# EAGLE board TM (EAGLE 7.5.0)
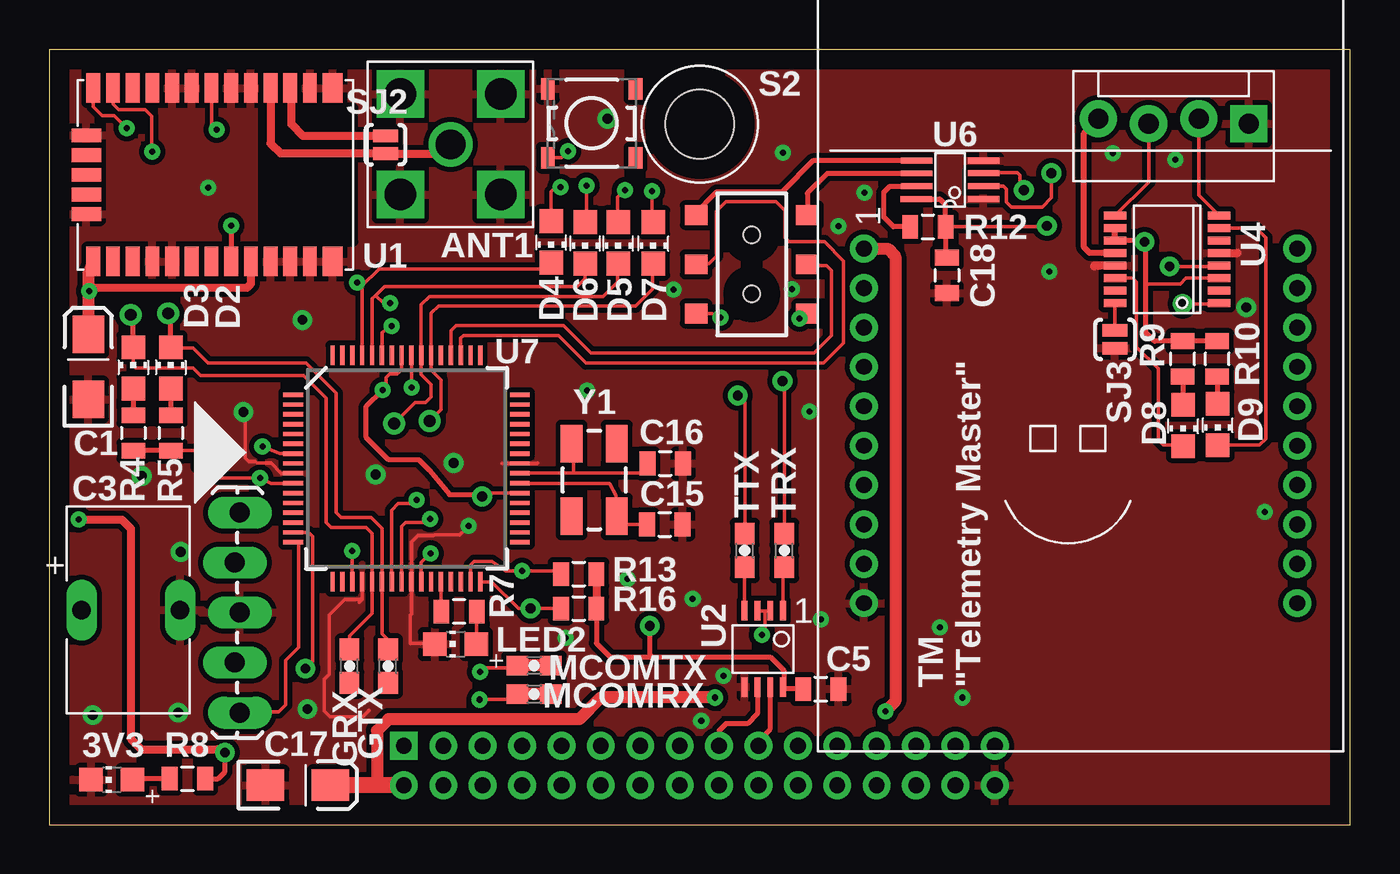
[diagram p0: board, top side]
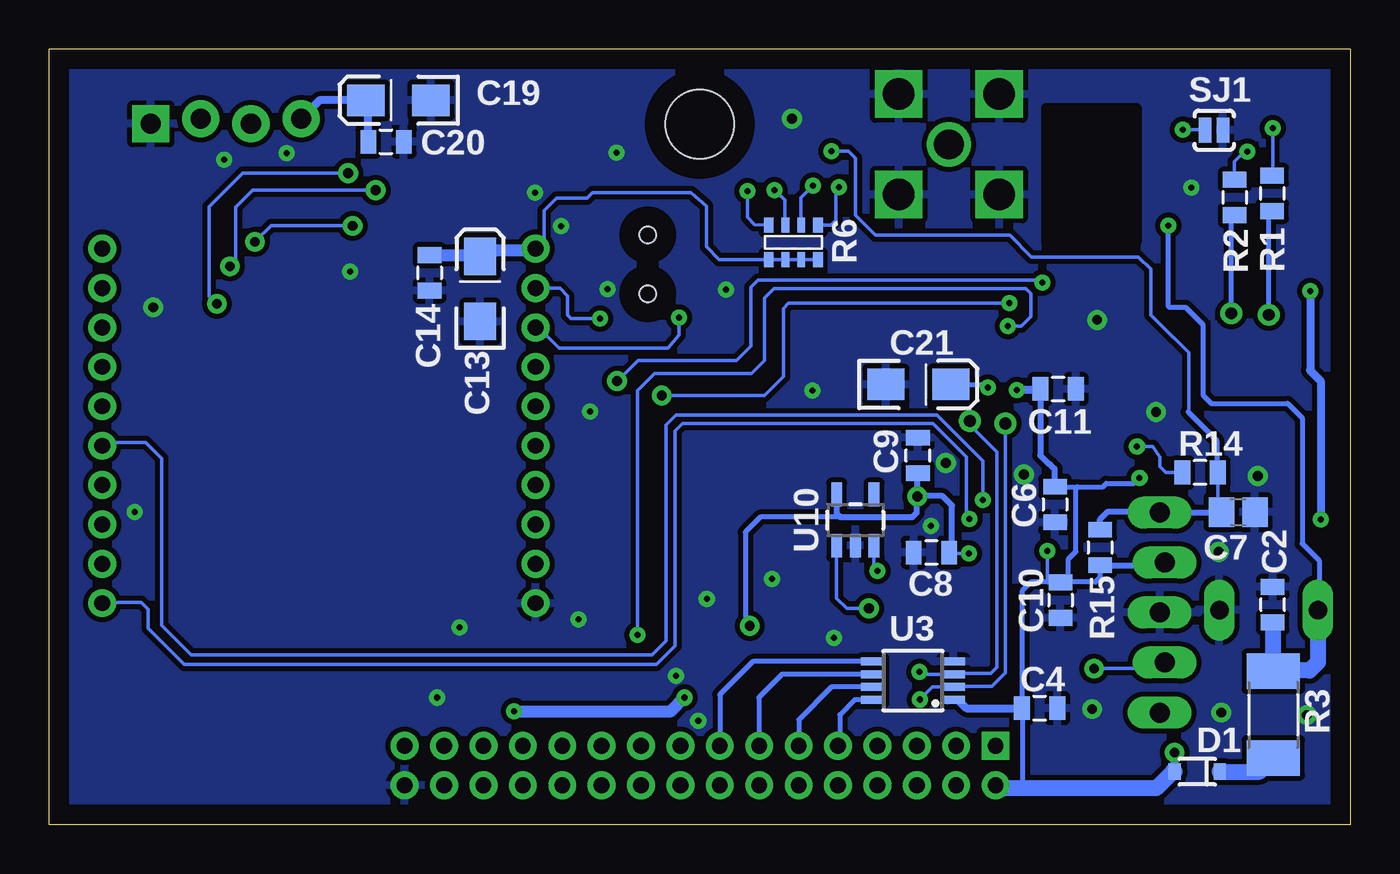
[diagram p1: board, bottom side, seen from below]

Size 66.04 x 39.37 mm. Coordinates in mm from the lower left corner, seen from the top.
Copper layers (1*16): Top 0.035mm / dielectric 1.5mm / Bottom 0.035mm
Design rules "SparkFun *": minimum track width 7mil, minimum drill 12mil, track to track 8mil, track to pad 8mil, pad to pad 8mil, via to via 8mil, smd to smd 8mil, copper to edge 40mil, drill to drill 8mil, minimum pad ring 12mil, minimum via ring 10mil, stop-mask expansion 4mil, vias tented up to drill 25mil, thermal gap 10mil

## Footprints (pad centres in the part's own frame; a part is rotated, then mirrored left to right if it is on the bottom)
CHIP-LED0805 = smd 1.2 x 1.2: A 0,-1.05; C 0,1.05
CONSMA002 = drill 1.6 square: 1 -2.55,2.55; 2 2.55,2.55; 3 2.55,-2.55; 4 -2.55,-2.55 | drill 1.5: C 0,0
EIA3216-16V = smd 1.9 x 1.6: A 1.65,0; C -1.65,0
0805 = smd 0.8 x 1.2: 1 -0.9,0; 2 0.9,0
EEC-S0HD224V = drill 0.95 long: + 0,2.5; - 0,-2.5
C0805 = smd 1.3 x 1.5: 1 -0.85,0; 2 0.85,0
CARD-2016 = drill 0.8 square: 1 18,4 | drill 0.8: 2 18,2; 3 20,4; 4 20,2; 5 22,4; 6 22,2; 7 24,4; 8 24,2; 9 26,4; 10 26,2; 11 28,4; 12 28,2; 13 30,4; 14 30,2; 15 32,4; 16 32,2; 17 34,4; 18 34,2; 19 36,4; 20 36,2; 21 38,4; 22 38,2; 23 40,4; 24 40,2; 25 42,4; 26 42,2; 27 44,4; 28 44,2; 29 46,4; 30 46,2; 31 48,4; 32 48,2 | hole 3.5: 33.02,35.56
SOD-323 = smd 0.63 x 0.83: 1 -1.15,0; 2 1.15,0
CHIP_LED0805 = smd 1.2 x 1.2: A 0,-1.05; C 0,1.05
0603 = smd 1.1 x 1: 1 -0.85,0; 2 0.85,0
1X05_LOCK_LONGPADS = drill 1.016 long: 1 0,0; 2 2.54,-0.254; 3 5.08,0; 4 7.62,-0.254; 5 10.16,0
MOLEX-1X4_LOCK = drill 1.016 pad 1.88 square: 1 0,0.127 | drill 1.016 pad 1.88: 2 2.54,-0.127; 3 5.08,0.127; 4 7.62,-0.127
R2010 = smd 1.8 x 2.7: 1 -2.2,0; 2 2.2,0
MNR14 = smd 0.5 x 0.75: 1 -1.25,-0.9; 4 1.25,-0.9; 5 1.25,0.85; 8 -1.25,0.85 | smd 0.4 x 0.75: 2 -0.4,-0.9; 3 0.4,-0.9; 6 0.4,0.85; 7 -0.4,0.85
AYZ0202 = smd 1 x 1.15: 1 -2.5,2.825; 2 0,2.825; 3 2.5,2.825; 4 -2.5,-2.825; 5 0,-2.825; 6 2.5,-2.825 | hole 0.85: 1.5,0; -1.5,0
TACTILE_SWITCH_SMD-2 = smd 0.7 x 1.1: 1 2.225,1.75; 2 2.225,-1.75; 3 -2.225,-1.75; 4 -2.225,1.75
SJ_2S-NO = smd 0.635 x 1.27: 1 -0.45,0; 2 0.45,0
PAD-JUMPER-2-NO_YES_SILK = smd 0.635 x 1.27: 1 -0.45,0; 2 0.45,0
CAM-M8Q = smd 1.5 x 0.7: 1 4.4,0; 2 4.4,1; 3 4.4,2; 4 4.4,3; 5 4.4,4; 6 4.4,5; 7 4.4,6; 8 4.4,7; 9 4.4,8; 10 4.4,9; 11 4.4,10; 12 4.4,11; 15 -4.4,11; 16 -4.4,10; 17 -4.4,9; 18 -4.4,8; 19 -4.4,7; 20 -4.4,6; 21 -4.4,5; 22 -4.4,4; 23 -4.4,3; 24 -4.4,2; 25 -4.4,1; 26 -4.4,0 | smd 1.5 x 1: 13 4.4,12.15; 14 -4.4,12.15 | smd 0.7 x 1.5: 27 -2,-0.35; 28 -1,-0.35; 29 0,-0.35; 30 1,-0.35; 31 2,-0.35
MSOP-8 = smd 0.3 x 1: 1 -0.975,-1.95; 2 -0.325,-1.95; 3 0.325,-1.95; 4 0.975,-1.95; 5 0.975,1.925; 6 0.325,1.925; 7 -0.325,1.925; 8 -0.975,1.925
MSOP8 = smd 0.4 x 1.2: 1 -0.975,-2.05; 2 -0.325,-2.05; 3 0.325,-2.05; 4 0.975,-2.05; 5 0.975,2.05; 6 0.325,2.05; 7 -0.325,2.05; 8 -0.975,2.05
SSOP-16 = smd 0.419 x 1.143: 1 -2.223,-2.642; 2 -1.587,-2.642; 3 -0.953,-2.642; 4 -0.318,-2.642; 5 0.318,-2.642; 6 0.953,-2.642; 7 1.587,-2.642; 8 2.223,-2.642; 9 2.223,2.642; 10 1.587,2.642; 11 0.953,2.642; 12 0.318,2.642; 13 -0.318,2.642; 14 -0.953,2.642; 15 -1.587,2.642; 16 -2.223,2.642
RM024-TH = drill 0.8: 1 9,11; 2 7,11; 3 5,11; 4 3,11; 5 1,11; 6 -1,11; 7 -3,11; 8 -5,11; 9 -7,11; 10 -9,11; 11 -9,-11; 12 -7,-11; 13 -5,-11; 14 -3,-11; 15 -1,-11; 16 1,-11; 17 3,-11; 18 5,-11; 19 7,-11; 20 9,-11
VFSOP-8 = smd 0.3 x 1.6: 1 -0.98,-1.7; 2 -0.33,-1.7; 3 0.33,-1.7; 4 0.98,-1.7; 5 0.97,1.69; 6 0.325,1.7; 7 -0.33,1.7; 8 -0.98,1.71
TQFP-64 = smd 0.22 x 1: 1 -3.75,-5.75; 2 -3.25,-5.75; 3 -2.75,-5.75; 4 -2.25,-5.75; 5 -1.75,-5.75; 6 -1.25,-5.75; 7 -0.75,-5.75; 8 -0.25,-5.75; 9 0.25,-5.75; 10 0.75,-5.75; 11 1.25,-5.75; 12 1.75,-5.75; 13 2.25,-5.75; 14 2.75,-5.75; 15 3.25,-5.75; 16 3.75,-5.75; 33 3.75,5.75; 34 3.25,5.75; 35 2.75,5.75; 36 2.25,5.75; 37 1.75,5.75; 38 1.25,5.75; 39 0.75,5.75; 40 0.25,5.75; 41 -0.25,5.75; 42 -0.75,5.75; 43 -1.25,5.75; 44 -1.75,5.75; 45 -2.25,5.75; 46 -2.75,5.75; 47 -3.25,5.75; 48 -3.75,5.75 | smd 1 x 0.22: 17 5.75,-3.75; 18 5.75,-3.25; 19 5.75,-2.75; 20 5.75,-2.25; 21 5.75,-1.75; 22 5.75,-1.25; 23 5.75,-0.75; 24 5.75,-0.25; 25 5.75,0.25; 26 5.75,0.75; 27 5.75,1.25; 28 5.75,1.75; 29 5.75,2.25; 30 5.75,2.75; 31 5.75,3.25; 32 5.75,3.75; 49 -5.75,3.75; 50 -5.75,3.25; 51 -5.75,2.75; 52 -5.75,2.25; 53 -5.75,1.75; 54 -5.75,1.25; 55 -5.75,0.75; 56 -5.75,0.25; 57 -5.75,-0.25; 58 -5.75,-0.75; 59 -5.75,-1.25; 60 -5.75,-1.75; 61 -5.75,-2.25; 62 -5.75,-2.75; 63 -5.75,-3.25; 64 -5.75,-3.75
SOT23-5 = smd 0.55 x 1.2: 1 -0.95,-1.3; 2 0,-1.3; 3 0.95,-1.3; 4 0.95,1.3; 5 -0.95,1.3
CRYSTAL-SMD-5X3 = smd 1.9 x 1.1: 1 -1.85,-1.15; 2 1.85,-1.15; 3 1.85,1.15; 4 -1.85,1.15

## Placement (x,y rotation side)
3V3  [CHIP-LED0805]  3.17,2.29 90 top
ANT1  CONMCX002  [CONSMA002]  20.37,34.54 270 top
C1  10UF  [EIA3216-16V]  1.98,23.24 90 top
C2  1UF  [0805]  3.94,11.18 90 bottom
C3  220MF  [EEC-S0HD224V]  4.14,10.9 90 top
C4  0.1UF  [0805]  15.77,5.92 0 bottom
C5  0.1UF  [0805]  39.17,6.88 0 top
C6  0.1UF  [0805]  14.99,16.26 270 bottom
C7  10n  [C0805]  5.69,15.88 0 bottom
C8  0.1UF  [0805]  21.26,13.82 180 bottom
C9  0.1UF  [0805]  21.95,18.75 90 bottom
C10  0.1UF  [0805]  14.71,11.4 270 bottom
C11  0.1UF  [0805]  14.83,22.12 0 bottom
C13  10UF  [EIA3216-16V]  44.17,27.2 90 bottom
C14  1UF  [0805]  46.74,28.02 270 bottom
C15  12PF  [0805]  31.24,15.24 0 top
C16  12PF  [0805]  31.27,18.34 0 top
C17  10UF  [EIA3216-16V]  12.62,2.01 0 top
C18  0.1UF  [0805]  45.57,27.89 270 top
C19  10UF  [EIA3216-16V]  48.31,36.78 180 bottom
C20  0.1UF  [0805]  48.95,34.67 0 bottom
C21  10UF  [EIA3216-16V]  21.92,22.35 0 bottom
CARD1  CARD-2016CARD  [CARD-2016]  0,0 0 top
D1  BAS316-TP  [SOD-323]  7.77,2.69 180 bottom
D2  GREEN  [CHIP_LED0805]  6.17,23.19 0 top
D3  RED  [CHIP_LED0805]  4.27,23.19 0 top
D4  RED  [CHIP_LED0805]  25.48,29.59 180 top
D5  RED  [CHIP_LED0805]  28.88,29.54 180 top
D6  GREEN  [CHIP_LED0805]  27.2,29.54 180 top
D7  GREEN  [CHIP_LED0805]  30.66,29.54 180 top
D8  RED  [CHIP_LED0805]  57.56,20.27 180 top
D9  GREEN  [CHIP_LED0805]  59.31,20.32 180 top
GRX  TP  [0603]  15.24,8.05 90 top
GTX  TP  [0603]  17.2,8.05 90 top
ICSP  ICSP  [1X05_LOCK_LONGPADS]  9.68,15.85 270 top
JP13  [MOLEX-1X4_LOCK]  60.88,35.71 180 top
LED2  [CHIP-LED0805]  20.62,9.17 90 top
MCOMRX  TP  [0603]  24.61,6.63 180 top
MCOMTX  TP  [0603]  24.61,8.08 180 top
R1  220  [0805]  3.96,32.05 270 bottom
R2  220  [0805]  5.87,31.85 270 bottom
R3  50  [R2010]  3.91,5.59 270 bottom
R4  1K  [0805]  4.27,19.89 270 top
R5  1K  [0805]  6.17,19.89 270 top
R6  RN-4_1K  [MNR14]  28.27,29.54 180 bottom
R7  499  [0805]  20.8,10.82 180 top
R8  499  [0805]  7.01,2.34 0 top
R9  1K  [0805]  57.53,23.65 90 top
R10  1K  [0805]  59.28,23.65 90 top
R12  1K  [0805]  44.6,30.35 0 top
R13  2K  [0805]  26.87,12.73 0 top
R14  499  [0805]  7.62,17.88 180 bottom
R15  1K  [0805]  12.7,14.07 270 bottom
R16  2K  [0805]  26.87,10.97 0 top
S1  DPDT  [AYZ0202]  35.66,28.45 270 top
S2  ts  [TACTILE_SWITCH_SMD-2]  27.53,35.61 180 top
SJ1  NO  [SJ_2S-NO]  6.91,35.26 180 bottom
SJ2  NO  [SJ_2S-NO]  17.07,34.52 270 top
SJ3  [PAD-JUMPER-2-NO_YES_SILK]  54.1,24.64 90 top
TRX  TP  [0603]  37.31,13.92 90 top
TTX  TP  [0603]  35.31,13.92 90 top
U1  CAM-M8Q  [CAM-M8Q]  2.24,32.99 270 top
U2  SN75HVD08DRMSOP  [MSOP-8]  36.27,8.92 180 top
U3  ISL83077MSOP  [MSOP8]  22.2,7.32 90 bottom
U4  FT230X  [SSOP-16]  56.74,28.7 90 top
U5  RM024  [RM024-TH]  52.35,20.24 90 top
U6  SN74LVC2G241  [VFSOP-8]  45.72,32.74 90 top
U7  DSPIC33EP256GM306  [TQFP-64]  18.14,18.08 270 top
U10  24LC00T-I/OT  [SOT23-5]  25.12,15.47 0 bottom
U$3  INDPK1  [PICKIT-PIN-1]  9.96,18.9 90 top
Y1  12Mhz  [CRYSTAL-SMD-5X3]  27.66,17.5 90 top

## Library data of the parts
3V3 C7 LED2 = adafruit
ANT1 U1 U5 U7 U$3 = FSAE Eletric
C1 C13 C17 C19 C21 = FSAE Electric; PARTNO: T491A106M016AT
C2 C14 = FSAE Electric; PARTNO: UMK212F105ZG-T
C3 = FSAE Electric; PARTNO: EEC-S0HD224V
C4-C6 C8-C11 C18 C20 = FSAE Electric; PARTNO: CC0805ZRY5V9BB104
C15 C16 = FSAE Electric; PARTNO: CL21C120JBANNNC
CARD1 = FSAE Electric
D1 = SparkFun-DiscreteSemi
D2 D6 D7 D9 = FSAE Electric; PARTNO: LTST-S220GKT
D3-D5 D8 = FSAE Electric; PARTNO: LH R974-LP-1
GRX GTX MCOMRX MCOMTX TRX TTX = FSAE Electric; PARTNO: 1625854-3
ICSP JP13 = SparkFun-Connectors
R1 R2 = FSAE Electric; PARTNO: RC0805FR-07220RL
R3 SJ1-SJ3 = SparkFun-Passives
R4 R5 R9 R10 R12 R15 = FSAE Electric; PARTNO: RC0805FR-071KL
R6 = FSAE Electric; PARTNO: MNR14ERAPJ102
R7 R8 R14 = FSAE Electric; PARTNO: RC0805FR-07499RL
R13 R16 = FSAE Electric; PARTNO: RC0805FR-072KL
S1 = SparkFun-Electromechanical; PROD_ID: SWCH-08179
S2 = SparkFun-Electromechanical
U2 = FSAE Electric; PARTNO: ISL83072EIUZA-T
U3 = NASA_LIB; PARTNO: ISL83072EIUZA-T
U4 = FSAE Electric; PARTNO: FT230XS-R
U6 = FSAE Electric; PARTNO: SN74LVC2G241DCUR
U10 = FSAE Electric; PARTNO: 24LC00T-I/OT
Y1 = SparkFun-FreqCtrl

## Nets
3V: C18.1 R9.2 R10.2 R12.2 U4.3 U4.10 U4.11 U6.8
+3V3: C1.A C4.1 C5.1 C6.1 C8.1 C9.1 C10.1 C11.1 C13.A C14.1 C17.A CARD1.2 D1.2 ICSP.2 R4.2 R5.2 R6.5 R6.6 R6.7 R6.8 R8.2 R13.2 R15.2 R16.2 U1.1 U1.9 U2.8 U3.1 U5.1 U7.10 U7.19 U7.26 U7.38 U7.57 U10.5
CONNECTED: U5.15 U7.23
GND: 3V3.C ANT1.1 ANT1.2 ANT1.3 ANT1.4 C1.C C2.2 C3.- C4.2 C5.2 C6.2 C7.2 C8.2 C9.2 C10.2 C11.2 C13.C C14.2 C15.2 C16.2 C17.C C18.2 C19.C C20.2 C21.C CARD1.32 ICSP.3 JP13.1 LED2.C S2.2 SJ1.1 SJ3.1 U1.4 U1.5 U1.10 U1.11 U1.12 U1.13 U1.14 U1.15 U1.18 U1.19 U1.21 U1.22 U1.27 U1.31 U2.5 U3.4 U4.5 U4.13 U5.10 U6.1 U6.4 U7.9 U7.20 U7.25 U7.41 U10.2
GPS-RX: D3.C GRX.1 GRX.2 R1.2 U7.21
GPS-TX: D2.C GTX.1 GTX.2 R2.2 U7.22
HORNEN: U7.49
INRG: U7.50
N$1: D2.A R5.1
N$2: R2.1 U1.25
N$3: ANT1.C SJ2.2 U1.17
N$4: R1.1 U1.26
N$5: SJ1.2 U1.20
N$6: D1.1 R3.2
N$7: 3V3.A R8.1
N$8: C2.1 C3.+ R3.1 U1.8
N$9: D7.A R6.4
N$10: D5.A R6.3
N$12: R7.2 U7.28
N$13: C16.1 U7.40 Y1.3
N$14: C15.1 U7.39 Y1.1
N$15: LED2.A R7.1
N$16: R13.1 U7.31 U10.3
N$17: SJ2.1 U1.16
N$18: D9.A R10.1
N$19: D9.C U4.7
N$20: D8.C U4.14
N$21: U4.4 U6.3
N$22: D4.A R6.1
N$23: D6.A R6.2
N$24: D3.A R4.1
N$25: SJ3.2 U4.16
N$27: U4.1 U6.2
N$28: JP13.3 U4.9
N$29: D8.A R9.1
N$32: R16.1 U7.32 U10.1
N$61: JP13.2 U4.8
N$69: R12.1 U6.7
N$85: C19.A C20.1 JP13.4 U4.12
N$86: C7.1 ICSP.1 R14.1 R15.1 S2.1
N$87: R14.2 U7.7
N$88: C21.A U7.56
N$90: ICSP.4 U7.15
N$91: ICSP.5 U7.16
RS-ECU-A: CARD1.9 U3.8
RS-ECU-B: CARD1.11 U3.7
RS-ECU-Y: CARD1.15 U3.5
RS-ECU-Z: CARD1.13 U3.6
RX: S1.2 U7.52
RXD0: D4.C TRX.1 TRX.2 U2.1 U7.61
RXD2: D5.C MCOMRX.1 MCOMRX.2 U3.2 U7.55
RXD3: S1.1 U6.6
RXD4: S1.3 U5.2
SETUP: U5.11 U7.24
TSA: CARD1.17 U2.6
TSB: CARD1.19 U2.7
TX: S1.5 U7.51
TXD0: D6.C TTX.1 TTX.2 U2.4 U7.60
TXD2: D7.C MCOMTX.1 MCOMTX.2 U3.3 U7.54
TXD3: S1.4 U6.5
TXD4: S1.6 U5.3
U3-EN: U2.2 U2.3 U7.59

## Tracks (layer width: path | path; a pad name or v marks a point on that pad's centre or on a via)
3V  (via drill 0.5)
  Top 0.178: R12.2 50.6,30.35 v50.65,30.4 | 54.17,29.59 U4.11 | U4.3 57.7,27.75 57.4,27.46 55.65,27.46 | 55.63,29.57 v55.6,29.59
  Top 0.254: U6.8 45.2,31.76 45.47,31.5 45.47,30.33 45.39,30.25 45.4,30.25 R12.2 45.5,28.65 C18.1 | R10.2 R9.2 56.1,24.55 55.65,24.99 55.65,27.46 55.65,29.54 v55.6,29.59 55.52,29.67 54.1,29.67
  Top 0.305: U4.11 54.1,29.67 U4.10
  Bottom 0.178: v50.65,30.4 54.79,30.4 v55.6,29.59
+3V3  (via drill 0.3, 0.5)
  Top 0.178: U7.26 18.89,13.32 v19.36,13.77 | U7.10 11.27,17.34 v10.69,17.6 8.08,17.6 7.52,18.16 7.52,18.87 7.39,19 6.18,19 R5.2 | U7.57 17.89,23.12 17.65,22.89 17.27,22.89 17.09,22.71 17.09,22.25 v16.92,22.07 | U7.38 22.14,16.84 v21.97,16.66 | 16.36,2.15 16.21,2 | v15.37,13.89 15.37,12.35 U7.19
  Top 0.254: R8.2 8.57,2.34 D1.2 8.92,3.8 v8.92,3.66 | R5.2 R4.2 | R16.2 27.77,9.21 28.47,8.51 30.61,8.51 | 30.61,8.51 36.6,8.51 37.29,7.82 37.29,7.03 U2.8 37.35,6.88 C5.1 | v30.48,10.08 30.48,8.64 30.61,8.51 | v16.92,22.07 16.09,21.25 16.09,19.66 17.23,18.52 18.77,18.52 19.28,18.01 20.32,16.76 21.87,16.76 v21.97,16.66
  Top 0.406: R16.2 R13.2 27.77,12.76 27.79,12.78 | U1.9 10.24,27.46 10.03,27.25 2.08,27.25 1.98,27.15 | C1.A 1.98,27.05 v2.03,27.1 | v1.5,15.49 3.68,15.49 4.14,15.04 4.14,4.37 4.67,3.84 8.56,3.84 v8.92,3.66
  Top 0.61: U1.1 1.98,27.99 1.98,27.15 C1.A | U5.1 42.56,29.24 42.95,28.85 42.95,6.27 v42.44,5.77 | v33.78,6.45 27.99,6.45 26.9,5.36 17.22,5.36 16.64,4.78 16.64,2.15 16.48,2
  Top 0.813: CARD1.2 16.48,2 16.21,2 C17.A
  Bottom 0.178: v19.36,13.77 20.12,13.77 20.22,13.97 20.22,13.83 C8.1 | 16.03,22.28 16.03,22.16 | 16.03,22.16 C11.1 | 20.45,6.2 20.3,6.34 19.9,6.34 19.88,6.34 19.48,5.94 16.84,5.94 16.64,5.74 | 16.03,22.16 16.03,22.15 15.95,22.07 | U7.19 15.39,13.88 v15.37,13.89 | R6.5 R6.6 R6.7 R6.8 32.04,28.69 32.69,29.34 32.69,31.39 33.45,32.08 38.46,32.08 38.74,31.8 40.28,31.8 40.92,31.17 40.92,29.67 U5.1 | 41.3,29.29 U5.1 | 41.33,29.26 U5.1
  Bottom 0.254: D1.2 | R15.2 12.7,12.55 12.93,12.32 14.69,12.32 C10.1 | 25.88,15.62 29.95,15.62 30.71,14.86 30.71,10.31 v30.48,10.08 | C6.1 13.87,17.16 | 13.87,17.16 12.56,17.16 U7.10 10.96,17.34 v10.69,17.6 | C10.1 14.39,12.3 14.3,12.4 14.3,13.49 13.92,13.87 13.92,17.11 13.87,17.16 | C10.1 14.74,12.34 U7.19 16.18,12.34 16.64,11.89 16.64,5.74 16.64,2.18 | 16.64,2.18 16.82,2 16.87,2 | 16.64,2.18 16.64,2.03 16.61,2 17.36,2 17.5,1.85
  Bottom 0.305: R15.2 9.56,13.17 ICSP.2 | C11.1 15.73,18.76 15.27,18.29 15.24,18.29 15.01,18.06 15.01,17.18 C6.1 | C9.1 21.97,17.82 v21.97,16.66 21.95,16.64 21.95,16.56 | U10.5 26.07,15.81 25.88,15.62 22.23,15.62 22,15.85 22,16.46 21.95,16.51 21.95,16.56 | 20.22,13.97 20.22,16.21 20.7,16.69 22.07,16.69 22.12,16.64 22.02,16.64 21.95,16.56
  Bottom 0.406: U3.1 19.9,6.34 19.48,5.92 C4.1 | 15.95,22.07 v16.92,22.07 | v2.03,27.1 2.03,23.06 1.5,22.53 v1.5,15.49 | D1.2 v8.92,3.66
  Bottom 0.61: C13.A 44.17,28.88 44.06,28.99 | 44.06,28.99 43.89,29.16 41.43,29.16 U5.1 | C14.1 43.86,28.92 43.79,28.98 44.04,28.98 44.06,28.99 | 44.15,29.08 44.06,28.99 | v42.44,5.77 34.47,5.77 v33.78,6.45
  Bottom 0.813: D1.2 9.02,2.69 9.86,1.85 17.5,1.85 17.85,1.85 CARD1.2
CONNECTED  (via drill 0.3)
  Top 0.178: U7.23 17.39,15.96 17.7,16.31 18.47,16.31 v18.64,16.48
  Bottom 0.178: v18.64,16.48 18.64,18.47 20.98,20.8 34.21,20.8 34.72,20.29 34.72,9.32 35.43,8.61 58.83,8.61 60.33,10.11 60.33,18.59 61.14,19.41 63.19,19.41 U5.15
GND  (via drill 0.3, 0.5)
  Top 0.178: U7.41 23.04,18.34 22.99,18.34 24.77,18.34 24.79,18.36 | U7.20 15.89,11.44 | 15.89,11.44 15.72,11.28 | U7.9 11.78,17.84 11.25,18.36 10.54,18.36 10.47,18.44 10.13,18.44 9.96,18.62 9.96,20.85 v9.86,20.96 | U7.25 18.39,14.35 18.72,14.68 19.51,14.68 19.53,14.71 20.83,14.71 v21.29,15.16 | U7.25 18.39,11.59 18.39,11.58 | U7.25 18.39,10.69 18.31,10.62 18.31,9.2 19.55,9.2 LED2.C | 15.89,11.44 15,11.44 14.2,10.64 14.2,7.62 13.94,7.37 13.94,5.79 14.25,5.49 15.9,5.49 16.23,5.82 16.21,5.82
  Top 0.406: U4.13 53.25,28.38 53.09,28.4 53.06,28.4 53.06,28.37 53.04,28.35 | U4.5 60.31,29.02 60.33,29.03
  other vias: 20.52,18.36 16.56,17.78 13.11,5.87 60.76,26.26 38.58,20.98 37.24,34.11 31.7,27.18 12.85,25.63 8.08,32.33 27.3,22.05 32.66,11.46 29.36,12.47 26.21,9.47 33.1,5.28 34.21,7.54 39.17,10.41 46.35,6.45 45.21,10.01 61.7,15.88 50.77,28.09 54,34.09 57.15,33.76 28.35,35.84 6.68,13.84 4.7,17.7 2.21,5.56 6.55,5.69 40.06,30.38 37.69,27.2 41.38,32.08
  pour Top (isolate 0.254, rank 5): 67.26,40.08 67.26,-1.83 -1.19,-1.96 -1.32,40.08
  pour Bottom (isolate 0.254, rank 5): 66.93,39.98 66.85,-0.56 -0.25,-0.81 -0.43,40.08
GPS-RX  (via drill 0.6)
  Top 0.178: D3.C 4.27,23.32 4.39,23.19 7.32,23.19 7.7,22.81 12.9,22.81 14.05,21.67 14.05,15.34 14.3,15.09 16.08,15.09 16.39,14.78 U7.21 16.39,10.72 15.24,9.58 GRX.2 GRX.1
  Top 0.254: D3.C 4.27,25.76 v4.14,25.88
  Bottom 0.254: v4.14,25.88 4.14,30.98 R1.2
GPS-TX  (via drill 0.6)
  Top 0.178: D2.C 6.21,24.21 7.32,24.21 8.08,23.44 13.03,23.44 14.55,21.92 14.55,15.85 14.81,15.6 16.33,15.6 16.89,15.04 U7.22 16.89,9.68 17.25,9.32 17.25,8.65 GTX.2 GTX.1
  Top 0.254: D2.C 6.17,25.83 v6.05,25.96
  Bottom 0.254: v6.05,25.96 6.05,30.77 R2.2
N$1
  Top 0.254: D2.A R5.1
N$2  (via drill 0.3)
  Top 0.178: U1.25 3.24,36.59 3.53,36.3 4.88,36.3 5.21,35.97 5.21,34.19 v5.23,34.16
  Bottom 0.178: v5.23,34.16 5.39,34.16 5.89,33.66 5.89,32.78 R2.1
N$3
  Top 0.406: U1.17 11.24,34.59 11.74,34.09 17.05,34.09 SJ2.2 19.9,34.07 ANT1.C
N$4  (via drill 0.3)
  Top 0.178: U1.26 2.24,36.45 2.69,35.99 3.3,35.99 v3.94,35.36
  Bottom 0.178: v3.94,35.36 3.94,32.98 R1.1
N$5  (via drill 0.3)
  Top 0.178: U1.20 8.24,35.55 v8.51,35.28
  Bottom 0.178: v8.51,35.28 7.38,35.28 SJ1.2
N$6
  Bottom 0.813: D1.1 4.61,2.69 R3.2
N$7
  Top 0.254: R8.1 4.28,2.34 3V3.A
N$8  (via drill 0.3)
  Top 0.254: v9.25,30.4 U1.8
  Bottom 0.254: C3.+ 1.58,10.88 1.58,13.41 2.44,14.28 2.44,20.65 3.18,21.39 7.06,21.39 7.47,21.79 7.47,25.37 8.36,26.26 9.17,26.26 9.25,26.34 v9.25,30.4
  Bottom 0.813: C3.+ 1.64,8.24 2.06,7.82 3.88,7.82 R3.1 3.94,7.81 C2.1
N$9  (via drill 0.3)
  Top 0.178: v30.61,32.16 30.61,30.64 D7.A
  Bottom 0.178: R6.4 30.23,30.46 30.61,30.84 v30.61,32.16
N$10  (via drill 0.3)
  Top 0.178: D5.A 28.85,31.85 v29.24,32.21
  Bottom 0.178: v29.24,32.21 29.16,32.16 28.7,31.7 28.7,30.47 R6.3
N$12
  Top 0.178: 19.89,10.9 19.89,12.31 U7.28
  Top 0.254: R7.2 19.9,10.86 19.89,10.9
N$13
  Top 0.178: C16.1 30.37,18.18 30.05,17.86 26.62,17.86 | U7.40 23.91,17.86 26.62,17.86 | 26.62,17.86 26.62,19.06 Y1.3
N$14
  Top 0.178: U7.39 26,17.34 26.29,17.32 28.45,17.32 28.78,16.71 28.78,15.51 Y1.1 29.04,15.24 C15.1
N$15
  Top 0.178: R7.1 21.7,8.99 LED2.A
N$16  (via drill 0.3)
  Top 0.178: U7.31 21.39,13.18 21.56,13.36 22.48,13.36 23.17,12.88 v24,12.88 25.91,12.88 26.06,12.57 26.06,12.64 R13.1
  Bottom 0.178: U10.3 24.17,13.09 v24,12.88
N$17
  Top 0.406: SJ2.1 12.89,34.97 12.29,35.56 12.29,37.34 U1.16
N$18
  Top 0.254: R10.1 59.28,21.4 D9.A
N$19
  Top 0.178: D9.C 61.43,19.27 61.75,19.58 61.75,29.79 61.27,30.28 U4.7
N$20
  Top 0.178: U4.14 55,27.75 55.19,27.56 55.19,24.26 56.29,23.17 56.29,19.53 56.54,19.28 57.5,19.28 D8.C
N$21  (via drill 0.5)
  Top 0.178: v49.48,32.21 49.28,32.41 49.28,32.97 49.15,33.1 47.45,33.1 U6.3 | v56.87,28.35 59.35,28.35 U4.4
  Bottom 0.178: v49.48,32.21 55.7,32.21 56.57,31.34 56.57,28.65 v56.87,28.35
N$22  (via drill 0.3)
  Top 0.178: v25.96,32.36 25.71,32.36 25.48,32.13 D4.A
  Bottom 0.178: R6.1 26.35,30.44 26.11,30.68 26.11,32.21 v25.96,32.36
N$23  (via drill 0.3)
  Top 0.178: v27.28,32.44 27.28,30.67 D6.A
  Bottom 0.178: R6.2 27.87,31.85 v27.28,32.44
N$24
  Top 0.254: D3.A R4.1
N$25
  Top 0.178: U4.16 SJ3.2
N$27  (via drill 0.5)
  Top 0.178: v50.88,33.07 50.88,31.83 50.42,31.34 48.84,31.34 48.59,31.6 48.59,32.26 48.44,32.41 U6.2 | v57.53,26.44 59.35,26.44 U4.1
  Bottom 0.178: v50.88,33.07 56.21,33.07 57.91,31.37 57.91,26.82 v57.53,26.44
N$28
  Top 0.178: JP13.3 55.8,32.63 U4.9
N$29
  Top 0.254: R9.1 57.53,21.34 D8.A
N$32  (via drill 0.5)
  Top 0.178: U7.32 22.46,12.34 23.83,10.97 v24.44,10.97 24.54,10.97 25.76,10.97 25.86,11.07 26.08,11.07 | 26.11,11.07 26.08,11.07 | 26.08,11.07 R16.1
  Bottom 0.178: U10.1 26.07,11.49 25.55,10.97 v24.44,10.97
N$61
  Top 0.178: JP13.2 58.34,31.97 U4.8
N$69
  Top 0.254: R12.1 42.85,30.35 42.37,30.84 42.37,32.11 42.67,32.41 U6.7 | U6.7
N$85
  Top 0.305: U4.12 52.82,29.02 52.53,29.31 52.53,35.1 JP13.4
  Bottom 0.406: C20.1 49.85,36.66 C19.A 52.32,36.78 JP13.4
N$86  (via drill 0.3)
  Top 0.178: S2.1 26.01,33.86 v26.34,34.19
  Bottom 0.178: R14.1 6.72,16.06 C7.1 | v26.34,34.19 25.48,34.19 25.12,33.83 25.12,30.94 24.1,29.92 17.27,29.92 16.18,28.83 10.74,28.83 10.13,28.22 10.13,25.88 8.99,24.74 8.97,24.74 8.2,23.98 8.2,20.98 8.23,20.96 | 9.55,15.9 9.63,15.9 ICSP.1
  Bottom 0.254: 8.23,20.96 6.78,19.51 6.78,17.94 R14.1
  Bottom 0.305: R15.1 12.7,15.49 12.29,15.9 9.55,15.9 9.47,15.82 9.5,15.82 9.53,15.85 6.73,15.85 6.66,15.93 6.59,15.93 C7.1
N$87  (via drill 0.3)
  Top 0.178: v10.82,19.2 11.69,18.85 U7.7
  Bottom 0.178: R14.2 9.37,17.88 9.68,18.19 9.68,18.67 10.03,19.2 v10.82,19.2
N$88  (via drill 0.3)
  Top 0.178: v18.39,22.2 U7.56
  Bottom 0.254: C21.A 18.54,22.35 v18.39,22.2
N$90  (via drill 0.5)
  Top 0.178: U7.15 13.16,14.84 13.36,14.63 13.36,8.28 v13.01,7.93
  Bottom 0.178: v13.01,7.93 9.73,7.93 ICSP.4
N$91
  Top 0.178: U7.16 12.54,14.34 12.65,14.22 12.65,8.99 11.99,8.33 11.99,6.1 11.63,5.74 9.73,5.74 ICSP.5
RS-ECU-A
  Bottom 0.254: U3.8 25.16,6.34 25.91,5.59 25.91,4.09 CARD1.9
RS-ECU-B
  Bottom 0.254: U3.7 26.33,6.99 27.99,5.33 27.99,4.01 CARD1.11
RS-ECU-Y
  Bottom 0.254: U3.5 30.32,8.29 32,6.6 CARD1.15
RS-ECU-Z
  Bottom 0.254: U3.6 28.83,7.64 30.02,6.45 30.02,4.02 CARD1.13
RX
  Top 0.178: U7.52 20.39,25.08 20.65,25.35 26.11,25.35 27.51,23.95 38.81,23.95 39.7,24.84 39.7,28.14 39.45,28.4 38.54,28.4 S1.2
RXD0  (via drill 0.3, 0.5)
  Top 0.178: 25.46,28.52 D4.C 25.15,28.22 16.74,28.22 15.89,27.37 | U7.61 15.89,27.37 | U2.1 37.25,13 TRX.1 | TRX.2 37.31,22.43 v37.21,22.53 | v15.62,27.53 15.72,27.53 15.89,27.37
  Top 0.254: TRX.2 TRX.1
  Bottom 0.178: v37.21,22.53 37.06,22.66 36.14,23.57 31.17,23.57 30.43,24.31 30.43,27.31 30.07,27.66 15.75,27.66 v15.62,27.53
RXD2  (via drill 0.3, 0.6)
  Top 0.178: v17.5,20.37 18.57,21.44 19.1,21.44 19.38,21.72 19.38,22.35 18.89,22.85 U7.55 18.89,26.4 19.3,26.82 28.12,26.82 28.85,27.56 28.85,28.47 D5.C | v21.84,6.35 23.43,6.35 MCOMRX.2
  Top 0.61: MCOMRX.1 MCOMRX.2
  Bottom 0.178: v17.5,20.37 17.5,7.7 18.19,7.01 20.13,7.01 U3.2 21.2,6.99 v21.84,6.35
RXD3
  Top 0.254: U6.6 39.49,33.07 38.48,32.06 38.48,30.81 38.51,30.79 38.51,30.93 S1.1
RXD4  (via drill 0.3)
  Top 0.178: S1.3 38.32,25.95 v38.07,25.71
  Bottom 0.178: v38.07,25.71 39.55,25.71 39.73,25.88 39.73,26.85 40.12,27.24 U5.2
SETUP  (via drill 0.3)
  Top 0.178: U7.24 17.89,15.14 18.09,15.34 19.13,15.34 v19.33,15.52
  Bottom 0.178: v19.33,15.52 19.36,15.57 19.48,15.7 19.48,18.67 21.18,20.37 33.88,20.37 34.26,19.99 34.26,9.07 35.2,8.13 59.18,8.13 61.01,9.96 61.01,10.92 61.37,11.28 63.32,11.28 U5.11
TSA
  Top 0.254: U2.6 35.95,5.64 35.43,5.13 34.34,5.13 34.01,4.8 34.01,4.01 CARD1.17
TSB
  Top 0.254: CARD1.19 36,4.28 36.6,4.88 U2.7
TX
  Top 0.178: U7.51 20.89,24.7 21.03,24.84 25.86,24.84 27.25,23.44 39.29,23.44 40.31,24.46 40.31,28.63 39.34,29.59 37.54,29.59 37.34,29.79 37.34,31.17 36.88,31.62 34.34,31.62 33.86,31.14 33.86,28.88 33.48,28.5 32.89,28.5 S1.5
TXD0  (via drill 0.3, 0.5)
  Top 0.178: U7.60 16.39,26.7 16.56,26.87 | 16.56,26.87 17.02,27.33 26.8,27.33 27.2,27.74 D6.C | U2.4 35.3,13.06 TTX.1 | TTX.2 35.31,21.44 v34.95,21.79 | v17.3,26.49 16.97,26.49 16.56,26.87
  Top 0.254: TTX.2 TTX.1
  Bottom 0.178: v34.95,21.79 29.74,21.79 28.78,22.76 28.78,26.21 28.52,26.49 v17.3,26.49
TXD2  (via drill 0.3, 0.6)
  Top 0.178: v19.3,20.5 19.89,21.08 19.89,22.58 19.39,23.08 U7.54 19.39,25.96 19.76,26.34 29.77,26.34 30.63,27.2 30.63,28.47 D7.C | v21.87,7.75 22.07,7.95 23.74,7.95 MCOMTX.2
  Top 0.61: MCOMTX.1 MCOMTX.2
  Bottom 0.178: v19.3,20.5 19.3,20.29 17.93,18.92 17.93,7.98 18.24,7.67 20.12,7.67 U3.3 21.76,7.64 v21.87,7.75
TXD3
  Top 0.254: S1.4 32.73,30.95 33.88,32.13 37.21,32.13 38.77,33.71 U6.5
TXD4  (via drill 0.3)
  Top 0.178: S1.6 33.64,25.95 v34.06,25.76
  Bottom 0.178: v34.06,25.76 34.06,24.87 34.62,24.21 40.16,24.21 41.2,25.24 U5.3
U3-EN  (via drill 0.3)
  Top 0.178: U2.2 U2.3 36.3,10.87 36.32,10.85 36.32,9.78 v36.17,9.63 | v17.37,25.32 16.89,24.99 16.89,23.64 U7.59
  Bottom 0.178: v36.17,9.63 36.17,22.05 35.31,22.91 30.4,22.91 29.74,23.57 29.74,26.75 29.26,27.23 16.46,27.23 16.21,26.98 16.21,25.81 16.69,25.32 v17.37,25.32

## Text on the board
tNames: TM / "Telemetry Master"